# Altium PCB NIM_to_LVCMOS.PcbDoc
Units mil, origin at the board's own origin, x right, y up, seen from the top; angles counter-clockwise.
Board outline 2808.66 x 2046.77 mil, 4 copper layers (Top Layer, Layer 1, Layer 2, Bottom Layer), stack 23.756 mil thick; 48 components, 24 nets, 155 pads, 47 vias.
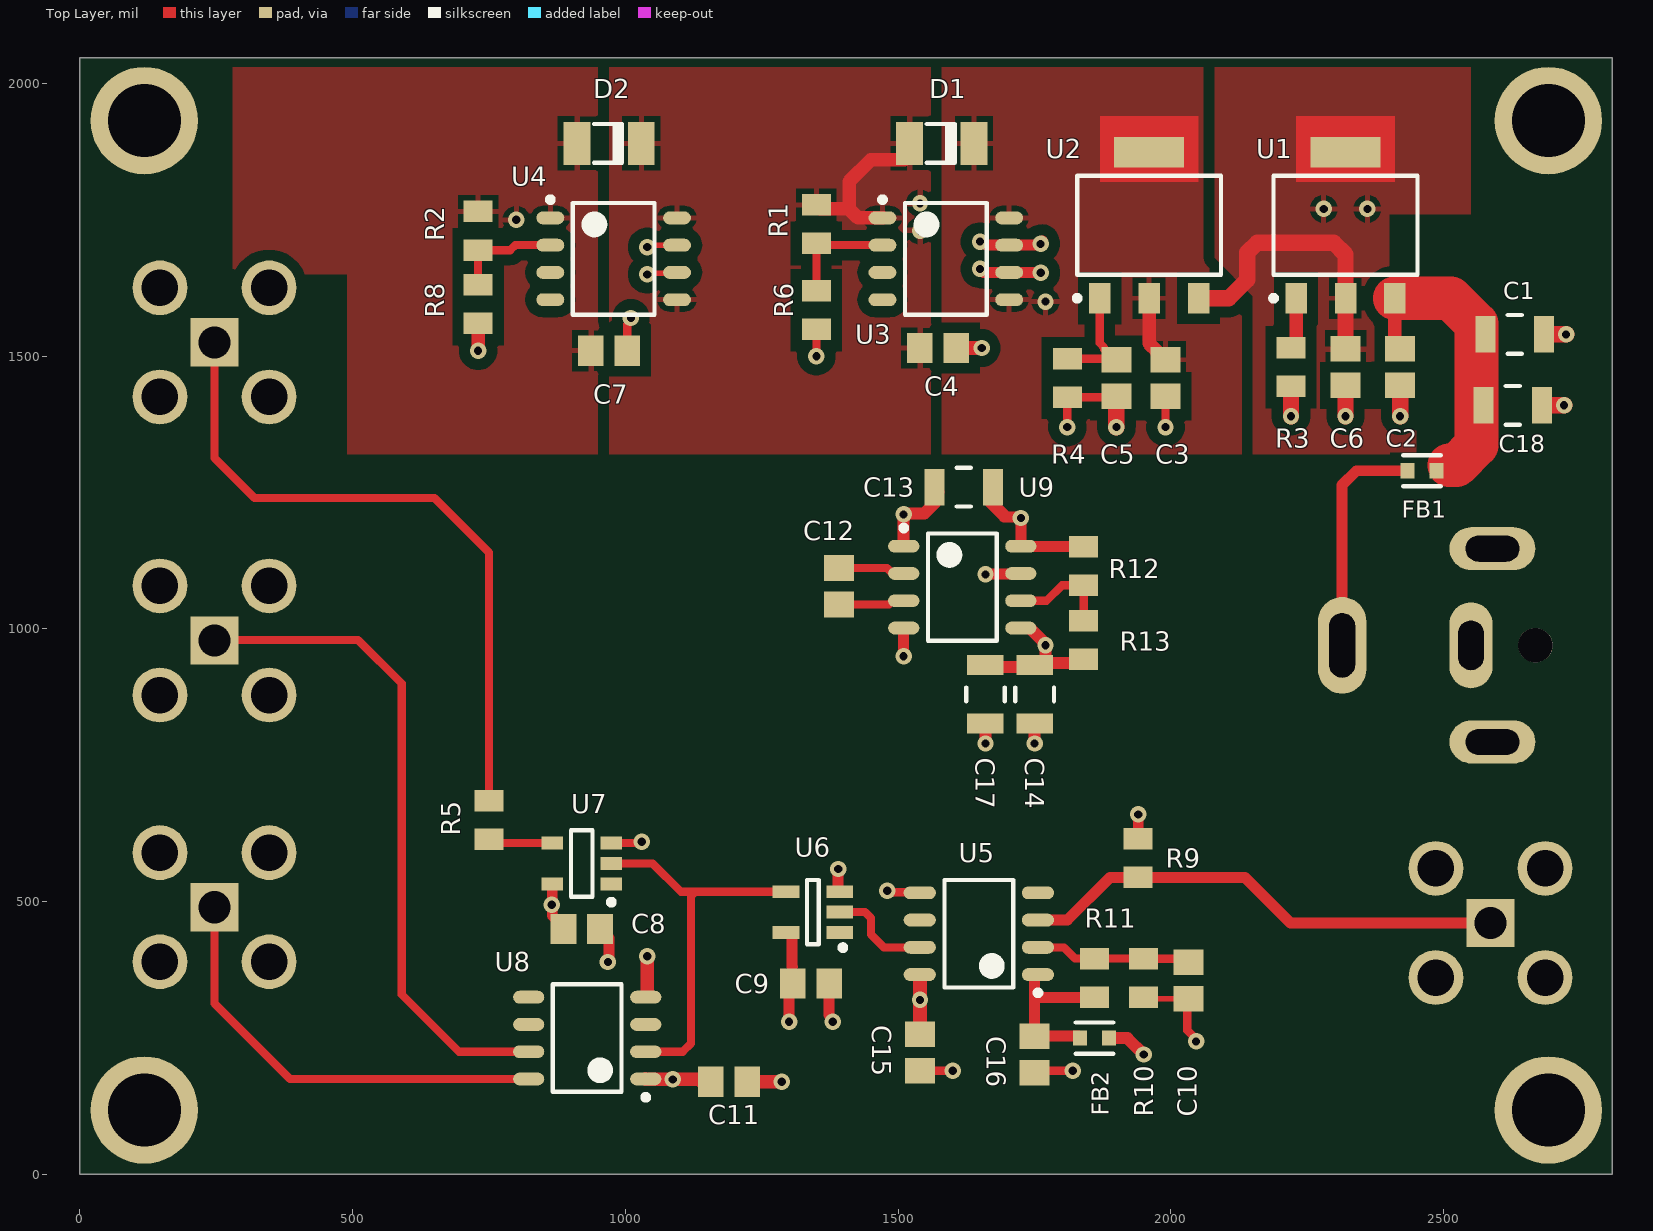
[diagram p0: Top Layer view]
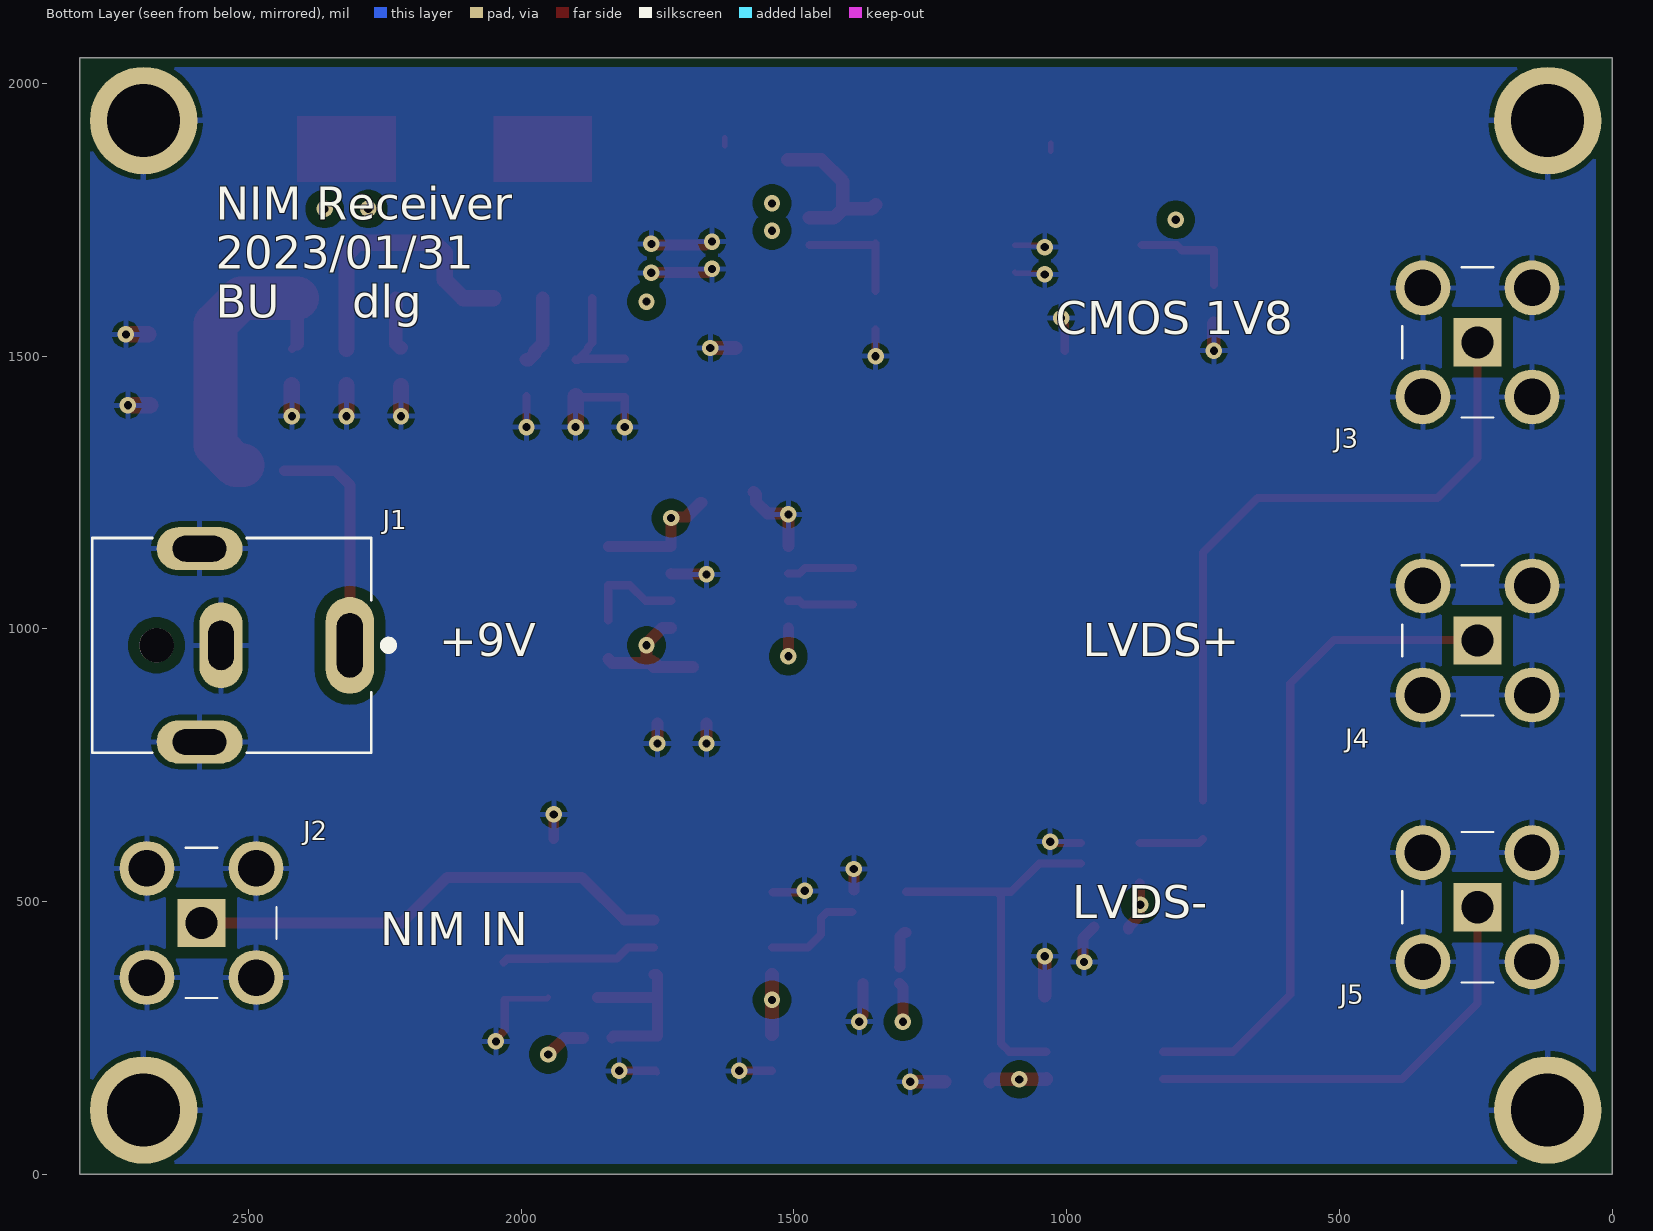
[diagram p1: Bottom Layer view, seen from below]
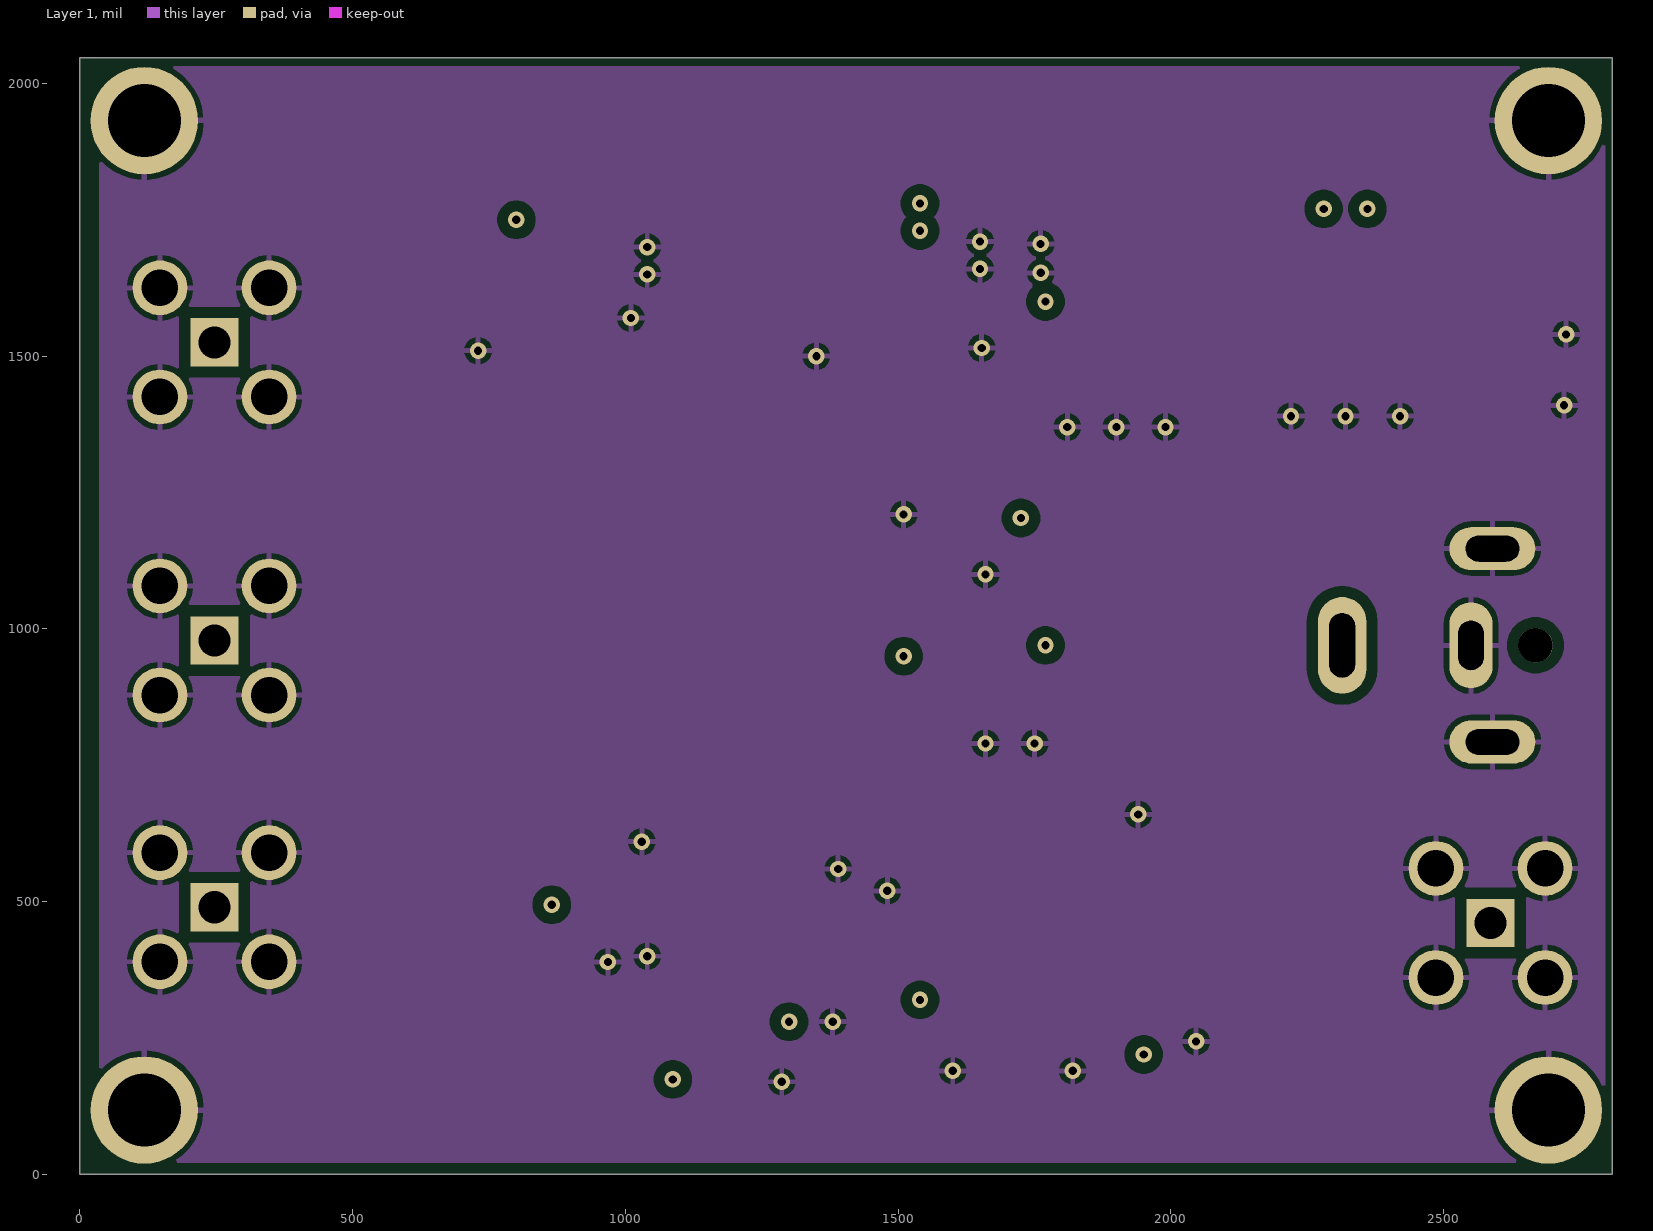
[diagram p2: Layer 1]
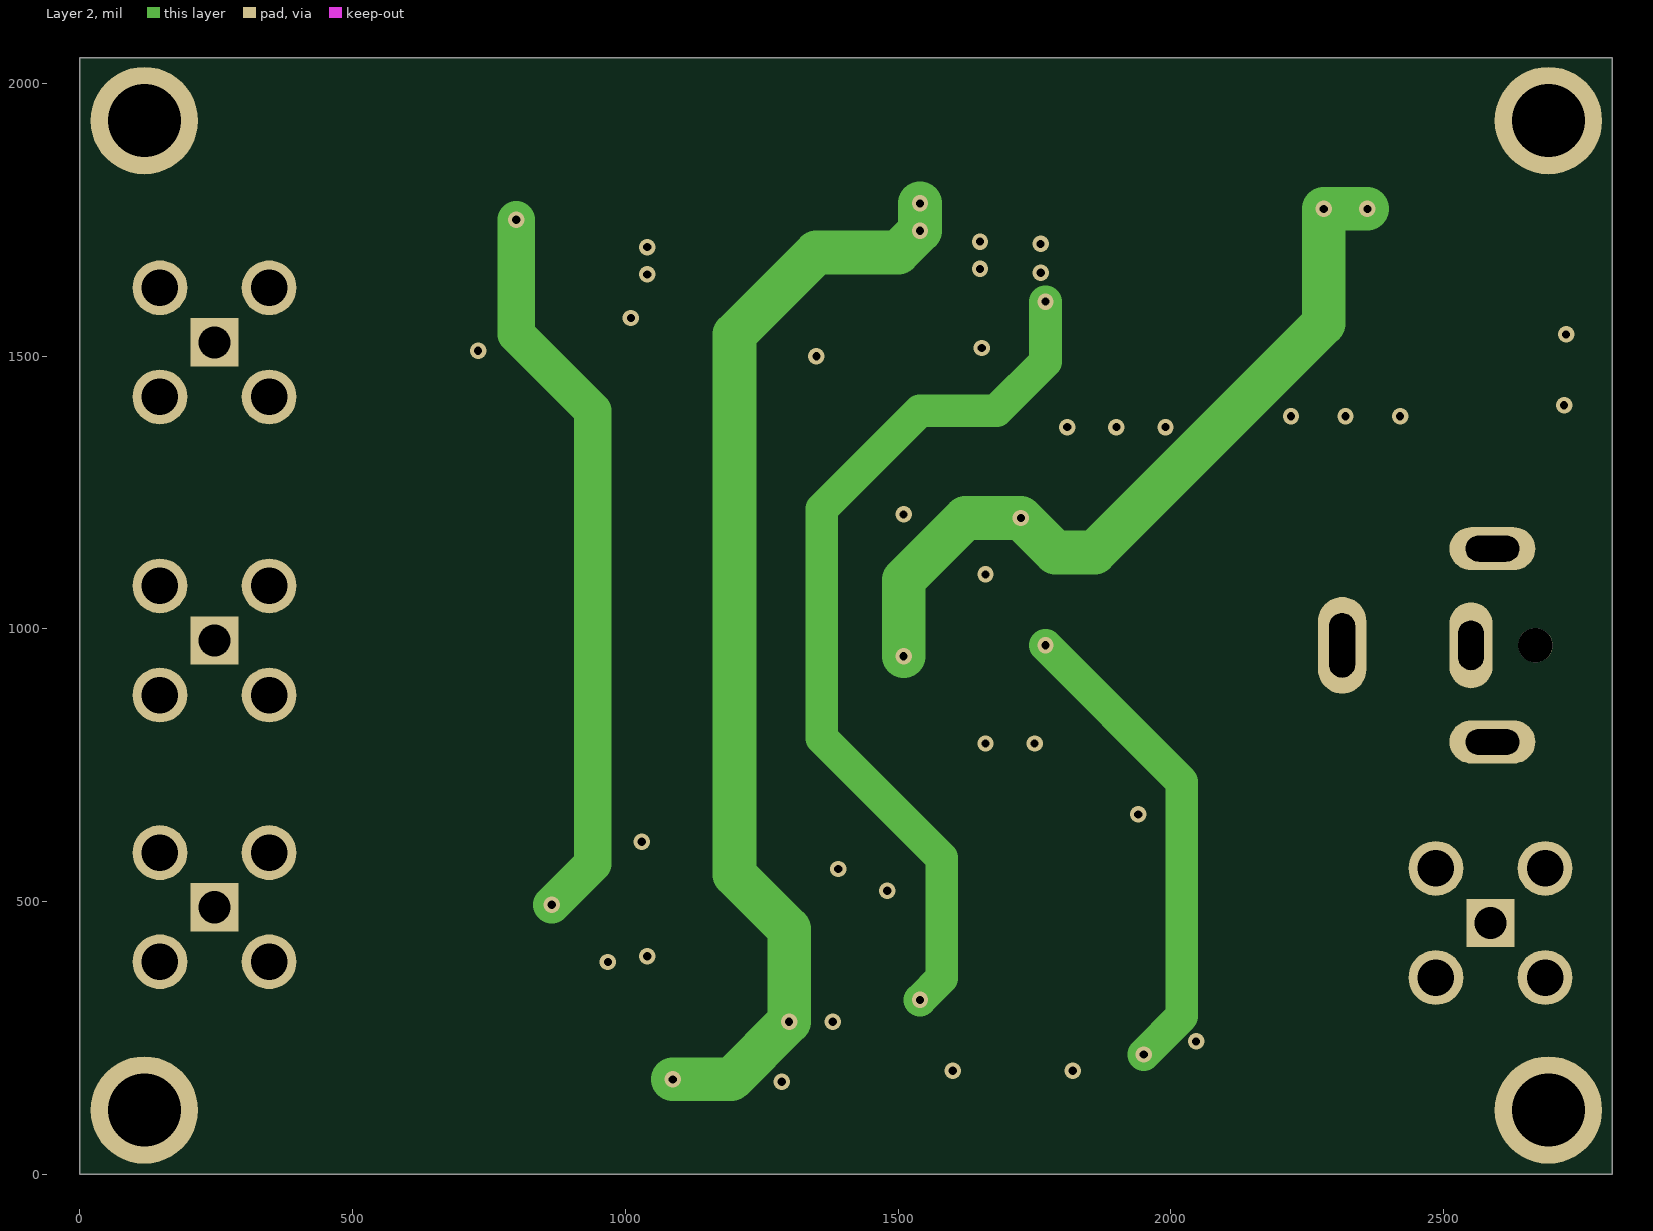
[diagram p3: Layer 2]
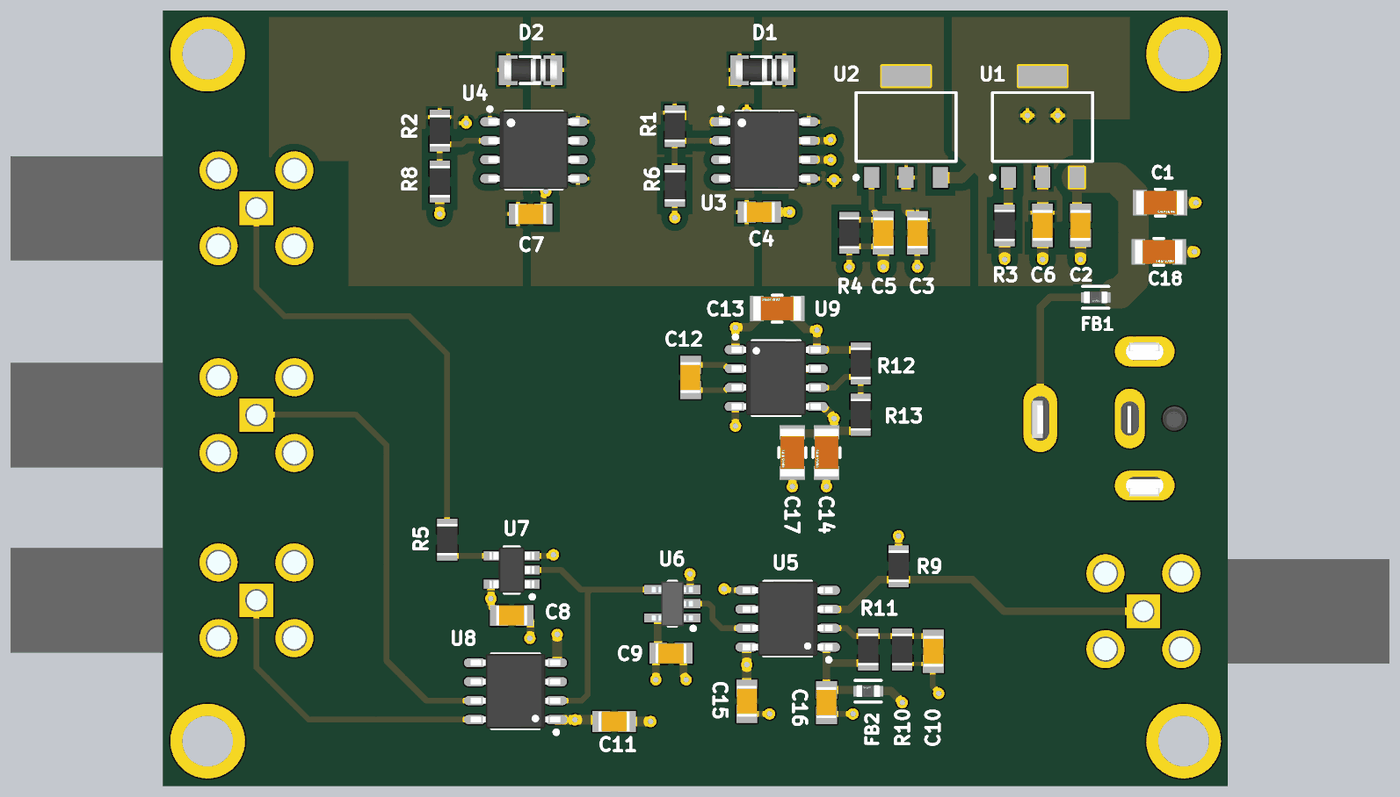
[diagram p4: 3D render of the assembled board from above, using the file's embedded part models]
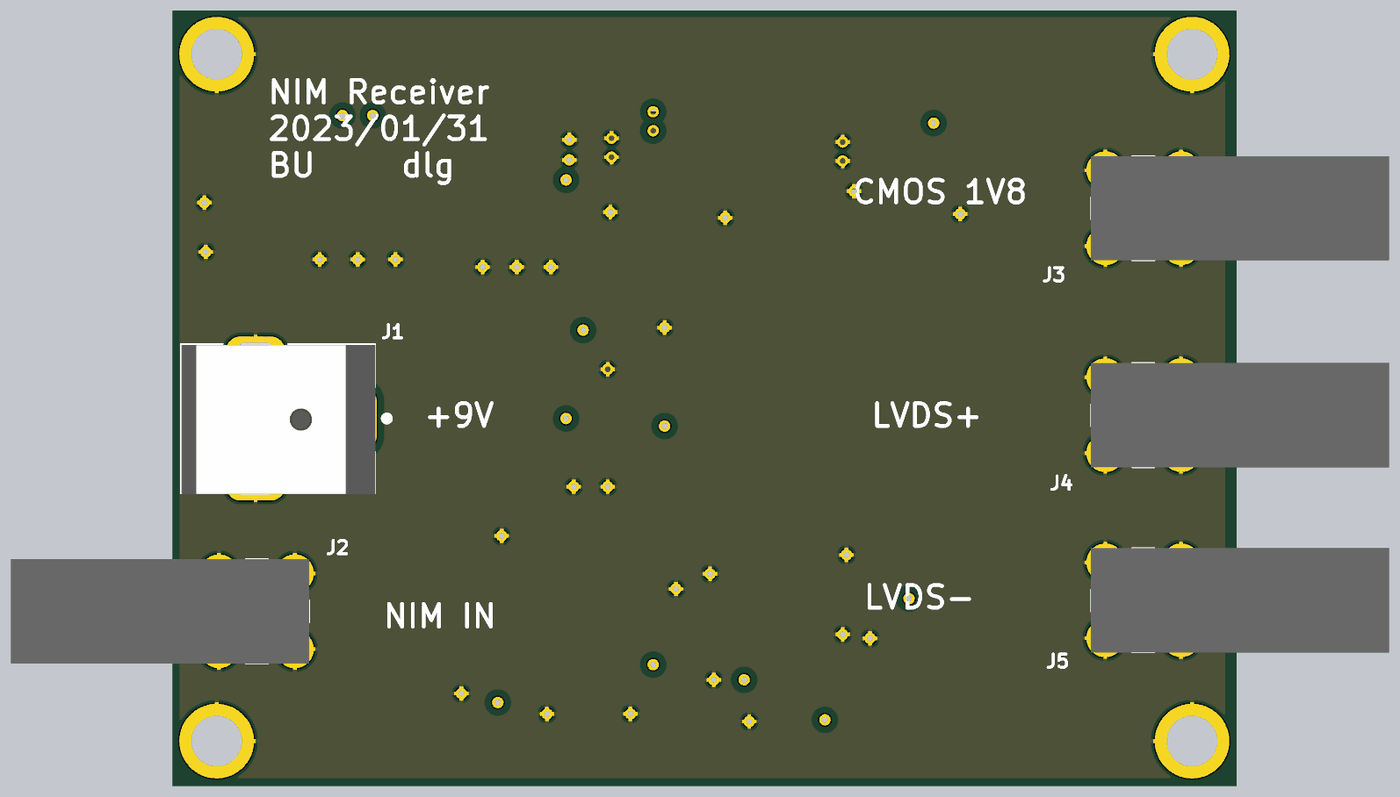
[diagram p5: 3D render of the assembled board from below, using the file's embedded part models]

## Layer stack, top to bottom
Top Solder: solder mask 0.4, Solder Resist, Dk 3.5
Top Layer: signal copper 1.4
Dielectric 2: prepreg 2.8, PP-006, Dk 4.1
Layer 1: signal copper 1.378
Dielectric 1: dielectric 12.6, FR-4, Dk 4.8
Layer 2: signal copper 1.378
Dielectric 3: prepreg 2.8, PP-006, Dk 4.1
Bottom Layer: signal copper 1.4
Bottom Solder: solder mask 0.4, Solder Resist, Dk 3.5

## Board outline
0,0 2808.66,0 2808.66,2046.77 0,2046.77

## Design rules (kind name [scope] priority, off if disabled: settings)
Clearance [All] p1: gap=6 ignorepadtopadclearanceinfootprint=TRUE except(20: Arc-Poly Track-Poly SMDPad-Poly THPad-Poly Via-Poly Fill-Poly Poly-Poly)
MinimumSolderMaskSliver [All] p1: minsoldermaskwidth=5
PolygonConnect [All] p1: connectstyle=Relief reliefconductorwidth=10 reliefentries=4 polygonreliefangle="90 Angle" airgapwidth=10
RoutingVias [All] p1: holewidth=15 width=30 viastyle="Through Hole" minholewidth=15 minwidth=30 maxholewidth=15 maxwidth=30
SolderMaskExpansion [All] p1: expansion=4 istentingtop=FALSE
Width [All] p1: maxlimit=80 minlimit=10 preferedwidth=10 minimp=50.000000 maximp=50.000000 favimp=50.000000
29 further rules are at their usual default settings.

## Components (designator, comment, footprint, x,y, rotation, side; value= is the part's Value field where it differs from the comment)
C1 "22uF" FP-CL31H-0_2-MFG 2630,1540 r0 top
C2 "2.2uF" CL21B225KAFNFNE 2420,1480 r270 top
C3 "2.2uF" CL21B225KAFNFNE 1990,1460 r270 top
C4 "2.2uF" CL21B225KAFNFNE 1573.07,1515 r0 top
C5 "0.1uF" CL21B104KACNNNC 1900,1460 r270 top
C6 "2.2uF" CL21B225KAFNFNE 2320,1480 r270 top
C7 "2.2uF" CL21B225KAFNFNE 970,1510 r180 top
C8 "0.1uF" CL21B104KACNNNC 920,450 r180 top
C9 "0.1uF" CL21B104KACNNNC 1340,350 r0 top
C10 "2.2uF" CL21B225KAFNFNE 2031.97,355.43 r270 top
C11 "0.1uF" CL21B104KACNNNC 1190,170 r0 top
C12 "2.2uF" CL21B225KAFNFNE 1391.34,1078.27 r270 top
C13 "22uF" FP-CL31H-0_2-MFG 1620,1260 r180 top
C14 "22uF" FP-CL31H-0_2-MFG 1750,880 r270 top
C15 "0.1uF" CL21B104KACNNNC 1540,223.46 r90 top
C16 "0.1uF" CL21B104KACNNNC 1750,220 r90 top
C17 "22uF" FP-CL31H-0_2-MFG 1660,880 r270 top
C18 "22uF" FP-CL31H-0_2-MFG 2626.36,1410 r0 top
D1 "Diode" BA679S-GS08 1580,1890 r180 top
D2 "Diode" BA679S-GS08 970,1890 r180 top
FB1 "BLM18PG471SN1D" FP-BLM18-0_15-t0_8-MFG 2460,1290 r0 top
FB2 "BLM18PG471SN1D" FP-BLM18-0_15-t0_8-MFG 1860,250 r180 top
J1 "Barrel Jack" PJ-063AH 2313.78,970 r0 bottom
J2 "SMA" RF249BT0050GHDW 2585.77,461.02 r180 bottom
J3 "SMA" RF249BT0050GHDW 246.79,1525.25 r0 bottom
J4 "SMA" RF249BT0050GHDW 246.79,978.88 r0 bottom
J5 "SMA" RF249BT0050GHDW 246.79,489.96 r0 bottom
R1 "102k" R0805 1350,1742.05 r90 top
R2 "12k" R0805 730,1730 r90 top
R3 "549k" R0805 2220,1480 r90 top
R4 "499k" R0805 1810,1460 r90 top
R5 "33" R0805 750,650 r90 top
R6 "30k" R0805 1350,1584.57 r90 top
R8 "30k" R0805 730,1595.43 r90 top
R9 "49R9" R0805 1940,580 r90 top
R10 "33" R0805 1950,360 r90 top
R11 "402R" R0805 1860,360 r270 top
R12 "111k" R0805 1840,1115.43 r270 top
R13 "105k" R0805 1840,980 r90 top
U1 "LT3080EST" LT-ST-3-SOT-223_N 2320,1740 r90 top locked
U2 "LT3080EST" LT-ST-3-SOT-223_N 1960,1740 r90 top locked
U3 "BD00KA5WF" BD00KA5WF-E2 1587.32,1678.5 r0 top
U4 "BD00KA5WF" BD00KA5WF-E2 978.5,1678.5 r0 top
U5 "SY100ELT25ZG-TR" SY100ELT25ZG-TR 1647.87,441.34 r180 top
U6 "MC74VHC1GT14DTT1" MC74VHC1GT14DTT1 1343.54,480.87 r180 top
U7 "SN74LV1T34DBVR" SN74LV1T34-DBV 920,570 r180 top
U8 "SN65LVDS1D" SN65LVDS1D 930,250 r180 top
U9 "MAX1673" MAX1673ESA+T 1617.48,1076.65 r0 top

## Footprints (in the part's own frame and the unit in brackets; to place one, negate y for a bottom-side part, rotate by r counter-clockwise, add the part's x,y. Pads: shape width x height; smd on the part's side, far side on the other; paste and mask are expansions set on the pad)
BA679S-GS08 [mm] "MELF Diode, 2-Leads, Body 3.50x1.50mm, IPC Medium Density"
  rect 1.25x2 smd: 1(-1.5,0) 2(1.5,0)
  silkscreen extent -0.7,-0.9 0.7,0.9, body extent -1.75,-0.74 1.75,0.74, height 1.5
BD00KA5WF-E2 [mm] "TSOP, 8-Leads, Body 5.00x4.40mm, Pitch 1.27mm, IPC Medium Density"
  oval 1.3x0.6 smd: 1(-2.95,1.905) 2(-2.95,0.635) 3(-2.95,-0.635) 4(-2.95,-1.905) 5(2.95,-1.905) 6(2.95,-0.635) 7(2.95,0.635) 8(2.95,1.905)
  silkscreen extent -3.07,-2.6 1.9,2.88, body extent -3.06,-2.6 3.06,2.6, height 1.6
CL21B104KACNNNC [mm] "0.1uF Chip Capacitor, 2-Leads, Body 2.00x1.25mm, IPC Medium Density"
  rect 1.2x1.4 smd: 1(-0.85,0) 2(0.85,0)
  body extent -1.05,-0.67 1.05,0.67, height 0.95
CL21B225KAFNFNE [mm] "2.2uF Chip Capacitor, 2-Leads, Body 2.00x1.25mm, IPC Medium Density"
  rect 1.2x1.4 smd: 1(-0.85,0) 2(0.85,0)
  body extent -1.05,-0.67 1.05,0.67, height 1.35
FP-BLM18-0_15-t0_8-MFG [mm]
  rect 0.65x0.7 smd paste+0 mask+0: 1(-0.675,0) 2(0.675,0)
  silkscreen extent -0.87,-0.72 0.87,0.72, body extent -1.1,-0.58 1.1,0.58, height 0.25
FP-CL31H-0_2-MFG [mm]
  rect 0.925x1.7 smd paste+0 mask+0: 1(-1.362,0) 2(1.362,0)
  silkscreen extent -0.33,-0.9 0.33,0.9, body extent -1.92,-1 1.92,1, height 0.25
LT-ST-3-SOT-223_N [mm] "SOT223, 4-Leads, Body 6.505x3.505mm, Pitch 2.3mm, IPC Medium Density"
  rect 1.4x1 smd: 1(-3.4,2.3) 2(-3.4,0) 3(-3.4,-2.3)
  rect 1.4x3.25 smd: 4(3.4,0)
  silkscreen extent -3.52,-3.35 2.3,3.47, body extent -1.86,-3.35 1.86,3.35, height 1.8
MAX1673ESA+T [mm] "SOIC, 8-Leads, Body 4.90x3.90mm, Pitch 1.27mm, IPC Medium Density"
  oval 1.45x0.6 smd: 1(-2.725,1.905) 2(-2.725,0.635) 3(-2.725,-0.635) 4(-2.725,-1.905) 5(2.725,-1.905) 6(2.725,-0.635) 7(2.725,0.635) 8(2.725,1.905)
  silkscreen extent -2.85,-2.5 1.6,2.88, body extent -3,-2.5 3,2.5, height 1.75
MC74VHC1GT14DTT1 [mm]
  rect 1.25x0.6 smd: 1(-1.25,0.95) 2(-1.25,0) 3(-1.25,-0.95) 4(1.25,-0.95) 5(1.25,0.95)
  silkscreen extent -1.52,-1.5 0.28,1.78, body extent -1.38,-1.5 1.38,1.5, height 1.1
PJ-063AH [mm]
  oval 2.25x4.5 hole 1.2 slot 3 at 90 deg: 1(0,0)
  oval 2x4 hole 1.2 slot 2.3 at 90 deg: 2(6,0)
  oval 4x2 hole 1.2 slot 2.5 at 0 deg: S1(7,4.5) S2(7,-4.5)
  round 1.6 hole 1.6 unplated: ""(9,0)
  silkscreen extent -2,-5 12,5, body extent -1.04,-5.08 11.96,5.22, height 9.01
R0805 [mm] "102k Chip Resistor, 2-Leads, Body 2.00x1.25mm, IPC Medium Density"
  rect 1x1.35 smd: 1(-0.9,0) 2(0.9,0)
  body extent -1.05,-0.67 1.05,0.67, height 0.6
RF249BT0050GHDW [mm]
  rect 2.25x2.25 hole 1.5: 1(0,0)
  round 2.55 hole 1.7: 2(-2.54,-2.54) 3(-2.54,2.54) 4(2.54,2.54) 5(2.54,-2.54)
  silkscreen extent -0.75,-3.5 3.5,3.5, body extent -16.47,-3.5 3.5,3.5, height 10.55
SN65LVDS1D [mm] "SOIC, 8-Leads, Body 4.90x3.90mm, Pitch 1.27mm, IPC Medium Density"
  oval 1.45x0.6 smd: 1(-2.725,1.905) 2(-2.725,0.635) 3(-2.725,-0.635) 4(-2.725,-1.905) 5(2.725,-1.905) 6(2.725,-0.635) 7(2.725,0.635) 8(2.725,1.905)
  silkscreen extent -2.85,-2.5 1.6,2.88, body extent -3,-2.5 3,2.5, height 1.75
SN74LV1T34-DBV [mm] "SOT23, 5-Leads, Body 2.90x2.80mm, Pitch 0.95mm, IPC Medium Density"
  rect 1x0.6 smd: 1(-1.375,0.95) 2(-1.375,0) 3(-1.375,-0.95) 4(1.375,-0.95) 5(1.375,0.95)
  silkscreen extent -1.5,-1.55 0.5,1.92, body extent -1.5,-1.53 1.5,1.53, height 1.45
SY100ELT25ZG-TR [mm] "SOIC, 8-Leads, Body 4.89x3.90mm, Pitch 1.27mm, IPC Medium Density"
  oval 1.5x0.6 smd: 1(-2.75,1.905) 2(-2.75,0.635) 3(-2.75,-0.635) 4(-2.75,-1.905) 5(2.75,-1.905) 6(2.75,-0.635) 7(2.75,0.635) 8(2.75,1.905)
  silkscreen extent -2.88,-2.5 1.6,2.88, body extent -3.01,-2.5 3.01,2.5, height 1.73

## Part data
C1 C13 C14 C17 C18: library part CMP-13271-000012-1, "CAP CER 22UF 25V X5R 1206", Manufacturer=Samsung, Manufacturer Part Number=CL31A226KAHNNNE, Package=CL31H-0.2, Temperature="-55°C to +85°C", Temperature Characteristic=X5R, Temperature Coefficient=15%, Temperature Range High=+85°C, Temperature Range Low=-55°C, Tolerance=10%, Voltage Rating=25V, Automotive=No, Capacitance=22uF, Category=Cap, ComponentLink2Description=Datasheet, ComponentLink2URL=http://www.samsungsem.com/kr/support/product-search/mlcc/__icsFiles/afieldfile/2019/05/10/19-CL31A226KAHNNNE.pdf, Device Class L1="Passive Components", Device Class L2=Capacitors, Device Class L3="Ceramic Capacitors", Digikey Description="CAP CER 22UF 25V X5R 1206", Height=1.8mm, Ipc Land Pattern Name=CAPC320160X160, Lead Free=Yes, Material=Ceramic, Octopart=https://octopart.com/cl31a226kahnnne-samsung-19832795, RoHS=TRUE
C2 C3 C4 C6 C7 C10 C12: library part CL21B225KAFNFNE, "CAP CER 2.2UF 25V X7R 0805", Case Code (Imperial)=0805, Case Code (Metric)=2012, Dielectric=X7R, Manufacturer=Samsung, Max Operating Temperature=125°C, Min Operating Temperature=-55°C, Package Quantity=1, Tolerance=10%, Voltage Rating=25V, Capacitance=2.2uF, Case/Package=0805, Category="Ceramic Capacitors", ComponentLink1Description=https://datasheet.ciiva.com/25798/cl21b225kafnfne-25798721.pdf?src-supplier=Digi-Key, ComponentLink1URL=https://datasheet.ciiva.com/25798/cl21b225kafnfne-25798721.pdf?src-supplier=Digi-Key, Construction=Flat, Depth=1.25mm, Height=1.25mm, Lead Free="Lead Free", Length=0.079inch, Manufacturer Part Number=CL21B225KAFNFNE, Mount="Surface Mount", Packaging="Tape and Reel", Pricing 1="2000=0.02328, 4000=0.02275, 8000=0.02221, 12000=0.02168, 16000=0.02114 (USD)", Radiation Hardening=No, RoHS=Yes, RoHS Compliant=Yes, Series=CL, Stock 1=46000, Supplier 1=Avnet, Supplier Part Number 1=CL21B225KAFNFNE, Thickness=0.053inch, Width=0.049inch
C5 C8 C9 C11 C15 C16: library part CL21B104KACNNNC, "CAP CER 0.1UF 25V X7R 0805", Capacitance=100nF, Case Code (Imperial)=0805, Case Code (Metric)=2012, Dielectric=X7R, Manufacturer=Samsung, Max Operating Temperature=125°C, Min Operating Temperature=-55°C, Package Quantity=1, Supplier Part Number 1=82AC9426, Tolerance=10%, Voltage=25V, Case/Package=0805, Category="Ceramic Capacitors", ComponentLink1Description=https://datasheet.ciiva.com/25801/cl21b104kacnnnc-25801824.pdf?src-supplier=Digi-Key, ComponentLink1URL=https://datasheet.ciiva.com/25801/cl21b104kacnnnc-25801824.pdf?src-supplier=Digi-Key, ComponentLink2Description=https://datasheet.ciiva.com/15216/getdatasheetpartid-355204-15216236.pdf?src-supplier=Verical, ComponentLink2URL=https://datasheet.ciiva.com/15216/getdatasheetpartid-355204-15216236.pdf?src-supplier=Verical, Construction=Flat, Contact Plating=Tin, Depth=1.25mm, Height=0.85mm, Length=2mm, Manufacturer Part Number=CL21B104KACNNNC, Mount="Surface Mount", Packaging="Tape and Reel", Pricing 1="1=0.00700, 4000=0.00700 (USD)", Radiation Hardening=No, RoHS=Yes, RoHS Compliant=Yes, Series=CL, Stock 1=16000, Supplier 1=Newark, Thickness=0.037inch, Voltage Rating=25V, Width=0.049inch
D1 D2: library part BA679S-GS08, "Diode PIN Attenuator 30V 2-Pin Mini-MELF SOD-80 T/R", Current Rating=50A, Forward Current=50mA, Forward Voltage=1V, Manufacturer="Vishay Semiconductors", Max Operating Temperature=125°C, Max Repetitive Reverse Voltage (Vrrm)=30V, Min Operating Temperature=-55°C, Package Quantity=2500, Supplier Part Number 1=112-BA679S-GS08CT-ND, Category=Diodes, ComponentLink1Description=https://datasheet.ciiva.com/1240/1749354-1240855.pdf?src-supplier=Newark, ComponentLink1URL=https://datasheet.ciiva.com/1240/1749354-1240855.pdf?src-supplier=Newark, ComponentLink2Description=https://datasheet.ciiva.com/9424/ba679-9424319.pdf?src-supplier=Avnet, ComponentLink2URL=https://datasheet.ciiva.com/9424/ba679-9424319.pdf?src-supplier=Avnet, ComponentLink3Description=https://datasheet.ciiva.com/1179/ba679-1179241.pdf?src-supplier=Element14, ComponentLink3URL=https://datasheet.ciiva.com/1179/ba679-1179241.pdf?src-supplier=Element14, Contact Plating=Tin,Silver, Diode Type="PIN - Single", Element Configuration=Single, Manufacturer Part Number=BA679S-GS08, Max Current Rating=50mA, Mount="Surface Mount", Number of Pins=2, Packaging="Tape and Reel", Pricing 1="1=0.53000, 10=0.43000, 100=0.29270, 500=0.21954, 1000=0.16466 (USD)", Reverse Voltage=30V, Reverse Voltage (DC)=30V, RoHS=Yes, RoHS Compliant=Yes, Series=-, Stock 1=7528, Supplier 1=Digi-Key
FB1 FB2: library part CMP-0686-00587-3, "Chip Ferrite Bead, 0603, 470Ω @ 100MHz, 0.2Ω, 25%, 1A", Case Code (Imperial)=0603, Case Code (Metric)=1608, Current Rating=1A, DC Resistance (DCR)=200mR, Max Operating Temperature=125°C, Min Operating Temperature=-55°C, Package Quantity=1, Test Frequency=100MHz, Tolerance=25%, Case/Package=0603, Core Material=Ferrite, DC Current=1A, DC Resistance-Max=200mR, Depth=0.8mm, Height=0.8mm, Impedance=470R, Lead Free="Lead Free", Length=1.6mm, Material=Steel, Max Current Rating=1A, Max DC Current=1A, Military Standard=Not, Number of Circuits=1, Number of Lines=1, Number of Pins=2, Packaging="Tape and Reel", Radiation Hardening=No, REACH SVHC="No SVHC", Resistance=200mR, RoHS Compliant=Yes, Series=BLM18P, Termination=SMD/SMT, Width=0.8mm
J1: library part PJ-063AH, "2.0 x 6.5 mm, 8.0 A, Horizontal, Through Hole, Shielded, Kinked Pins, Dc Power Jack Connector", Current Rating=8A, Flammability Rating="UL94 V-0", Housing Color=Black, Insulation Resistance=100MR, Manufacturer=CUI, Max Operating Temperature=85°C, Min Operating Temperature=-25°C, Package Quantity=500, Supplier Part Number 1=490-PJ-063AH, Voltage Rating=24V, Category=Connectors, ComponentLink1Description=https://www.cui.com/product/resource/digikeypdf/pj-063ah.pdf?src-supplier=Digi-Key, ComponentLink1URL=https://www.cui.com/product/resource/digikeypdf/pj-063ah.pdf?src-supplier=Digi-Key, ComponentLink2Description=https://www.cui.com/product/resource/digikeypdf/pj-063ah.pdf?src-supplier=Arrow+Electronics, ComponentLink2URL=https://www.cui.com/product/resource/digikeypdf/pj-063ah.pdf?src-supplier=Arrow+Electronics, ComponentLink3Description=https://www.cui.com/product/resource/digikeypdf/pj-063ah.pdf?src-supplier=Mouser, ComponentLink3URL=https://www.cui.com/product/resource/digikeypdf/pj-063ah.pdf?src-supplier=Mouser, ComponentLink4Description=https://www.cui.com/product/resource/digikeypdf/pj-063ah.pdf?src-supplier=Onlinecomponents.com, ComponentLink4URL=https://www.cui.com/product/resource/digikeypdf/pj-063ah.pdf?src-supplier=Onlinecomponents.com, ComponentLink5Description=http://www.cui.com/Product/Resource/FuturePDF/PJ-063AH.pdf?src-supplier=Future+Electronics, ComponentLink5URL=http://www.cui.com/Product/Resource/FuturePDF/PJ-063AH.pdf?src-supplier=Future+Electronics, ComponentLink6Description=https://www.cui.com/product/resource/digikeypdf/pj-063ah.pdf?src-supplier=Verical, ComponentLink6URL=https://www.cui.com/product/resource/digikeypdf/pj-063ah.pdf?src-supplier=Verical, ComponentLink7Description=https://www.cui.com/product/resource/digikeypdf/pj-063ah.pdf?src-supplier=Quest, ComponentLink7URL=https://www.cui.com/product/resource/digikeypdf/pj-063ah.pdf?src-supplier=Quest, ComponentLink8Description=https://www.cui.com/product/resource/digikeypdf/pj-063ah.pdf?src-supplier=NAC+Semi, ComponentLink8URL=https://www.cui.com/product/resource/digikeypdf/pj-063ah.pdf?src-supplier=NAC+Semi, Connector Type=Jack, Contact Gender=Male, Contact Material=Copper, Contact Plating=Nickel, Gender=Male, Housing Material=Thermoplastic, Lead Free="Lead Free", Manufacturer Part Number=PJ-063AH, Mount="Through Hole", Number of Conductors=2, Orientation=Horizontal, RoHS=Yes, RoHS Compliant=Yes, Series=-, Shielding=Shielded, Supplier 1=Mouser, Termination="Through Hole"
J2 J3 J4 J5: library part RF2-49B-T-00-50-G-HDW, "Conn SMA 0Hz to 6GHz 50Ohm Solder RA Thru-Hole RCP Gold", Manufacturer="Adam Equipment", Category="RF / Coaxial Connectors", Manufacturer Part Number=RF2-49B-T-00-50-G-HDW, Pricing 1="1=3.05500, 10=2.75100, 25=2.58300, 50=2.49800, 100=2.35600, 300=2.04400, 500=1.97200 (USD)", RoHS=No, Stock 1=26, Supplier 1="Arrow Electronics", Supplier Part Number 1=RF2-49B-T-00-50-G-HDW
R1: library part RC0805FR-07102KL, "Res Thick Film 0805 102K Ohm 1% 1/8W ±100ppm/°C SMD Paper T/R", Case Code (Imperial)=0805, Case Code (Metric)=2012, Manufacturer=Yageo, Max Operating Temperature=155°C, Max Power Dissipation=125mW, Min Operating Temperature=-55°C, Package Quantity=1, Resistance=102kR, Resistor Type="Thick Film", Supplier Part Number 1=32AK1123, Temperature Coefficient=100ppm/°C, Tolerance=1%, Voltage Rating=150V, Case/Package=0805, Category="Chip SMD Resistors", ComponentLink1Description=https://datasheet.ciiva.com/2457/pyu-r-int-thick-7-2457663.pdf?src-supplier=Digi-Key, ComponentLink1URL=https://datasheet.ciiva.com/2457/pyu-r-int-thick-7-2457663.pdf?src-supplier=Digi-Key, ComponentLink2Description=https://datasheet.ciiva.com/2457/pyu-r-int-thick-7-2457664.pdf?src-supplier=Digi-Key, ComponentLink2URL=https://datasheet.ciiva.com/2457/pyu-r-int-thick-7-2457664.pdf?src-supplier=Digi-Key, ComponentLink3Description=https://datasheet.ciiva.com/2457/pyu-r-int-thick-7-2457662.pdf?src-supplier=Digi-Key, ComponentLink3URL=https://datasheet.ciiva.com/2457/pyu-r-int-thick-7-2457662.pdf?src-supplier=Digi-Key, Construction=Rectangular, Contact Plating=Tin,Matte,Lead, Depth=1.25mm, Features="Moisture Resistant", Height=0.024inch, Lead Free="Lead Free", Length=2mm, Manufacturer Part Number=RC0805FR-07102KL, Military Standard=Not, Number of Terminations=2, Packaging="Tape and Reel", Power Rating=125mW, Pricing 1="10=0.10000, 25=0.02900, 50=0.02100, 100=0.01200 (USD)", Radiation Hardening=No, RoHS=Yes, RoHS Compliant=Yes, Series=RC, Stock 1=24480, Supplier 1=Newark, Termination=SMD/SMT, Voltage Rating (DC)=150V, Width=0.049inch
R2: library part RC0805JR-0712KL, "Res Thick Film 0805 12K Ohm 5% 0.125W(1/8W) ±100ppm/C Pad SMD T/R", Case Code (Imperial)=0805, Case Code (Metric)=2012, Manufacturer=Yageo, Max Operating Temperature=155°C, Max Power Dissipation=125mW, Min Operating Temperature=-55°C, Package Quantity=5000, Resistance=12kR, Resistance Tolerance=5%, Resistor Type="Thick Film", Supplier Part Number 1=26M6818, Temperature Coefficient=100ppm/°C, Voltage Rating=150V, Case/Package=0805, Category="Chip SMD Resistors", ComponentLink1Description=https://datasheet.ciiva.com/7941/442941-7941880.pdf?src-supplier=Element14, ComponentLink1URL=https://datasheet.ciiva.com/7941/442941-7941880.pdf?src-supplier=Element14, ComponentLink2Description=https://datasheet.ciiva.com/7941/442941-7941881.pdf?src-supplier=Element14, ComponentLink2URL=https://datasheet.ciiva.com/7941/442941-7941881.pdf?src-supplier=Element14, ComponentLink3Description=https://datasheet.ciiva.com/17082/rc0805-17082649.pdf?src-supplier=Future+Electronics, ComponentLink3URL=https://datasheet.ciiva.com/17082/rc0805-17082649.pdf?src-supplier=Future+Electronics, Construction=Rectangular, Contact Plating=Tin,Lead, Depth=1.25mm, Features="Moisture Resistant", Height=0.5mm, Lead Free="Lead Free", Length=2mm, Manufacturer Part Number=RC0805JR-0712KL, Military Standard=Not, Number of Terminations=2, Packaging="Cut Tape", Power Rating=125mW, Pricing 1="10=0.10000, 25=0.02900, 50=0.02100, 100=0.01300, 250=0.01200, 500=0.01100 (USD)", Radiation Hardening=No, RoHS=Yes, RoHS Compliant=Yes, Series=RC, Size Code=0805, Stock 1=2308, Supplier 1=Newark, Termination=SMD/SMT, Tolerance=5%, Width=1.25mm
R3: library part "R0805 549k", "549 kOhms ±1% 0.125W, 1/8W Chip Resistor 0805 (2012 Metric) Automotive AEC-Q200, High Voltage Thick Film", Part=KTR10EZPF5493
R4: library part "R0805 499k", "499k kOhms ±1% 0.125W, 1/8W Chip Resistor 0805 (2012 Metric)", Part=RC0805FR-07499KL
R5 R10: library part RC0805FR-0733RL, "Res Thick Film 0805 33 Ohm 1% 1/8W +/-100ppm/ßC Molded SMD Paper T/R", Case Code (Imperial)=0805, Case Code (Metric)=2012, Manufacturer=Yageo, Max Operating Temperature=155°C, Max Power Dissipation=125mW, Min Operating Temperature=-55°C, Package Quantity=1, Resistance=33R, Resistance Tolerance=1%, Resistor Type="Thick Film", Temperature Coefficient=100ppm/°C, Voltage Rating=150V, Case/Package=0805, Category="Chip SMD Resistors", ComponentLink1Description=https://datasheet.ciiva.com/11808/0900766b8106beab-11808886.pdf?src-supplier=RSComponents, ComponentLink1URL=https://datasheet.ciiva.com/11808/0900766b8106beab-11808886.pdf?src-supplier=RSComponents, ComponentLink2Description=https://datasheet.ciiva.com/46447/444164-46447578.pdf?src-supplier=Element14, ComponentLink2URL=https://datasheet.ciiva.com/46447/444164-46447578.pdf?src-supplier=Element14, ComponentLink3Description=https://datasheet.ciiva.com/2457/pyu-r-int-thick-7-2457741.pdf?src-supplier=Digi-Key, ComponentLink3URL=https://datasheet.ciiva.com/2457/pyu-r-int-thick-7-2457741.pdf?src-supplier=Digi-Key, ComponentLink4Description=https://datasheet.ciiva.com/2457/pyu-r-int-thick-7-2457742.pdf?src-supplier=Digi-Key, ComponentLink4URL=https://datasheet.ciiva.com/2457/pyu-r-int-thick-7-2457742.pdf?src-supplier=Digi-Key, ComponentLink5Description=https://datasheet.ciiva.com/2457/pyu-r-int-thick-7-2457740.pdf?src-supplier=Digi-Key, ComponentLink5URL=https://datasheet.ciiva.com/2457/pyu-r-int-thick-7-2457740.pdf?src-supplier=Digi-Key, ComponentLink6Description=https://datasheet.ciiva.com/5561/rc0805-257173-5561849.pdf?src-supplier=Mouser, ComponentLink6URL=https://datasheet.ciiva.com/5561/rc0805-257173-5561849.pdf?src-supplier=Mouser, ComponentLink7Description=https://datasheet.ciiva.com/7941/444164-7941773.pdf?src-supplier=Element14, ComponentLink7URL=https://datasheet.ciiva.com/7941/444164-7941773.pdf?src-supplier=Element14, ComponentLink8Description=https://datasheet.ciiva.com/7941/444164-7941772.pdf?src-supplier=Element14, ComponentLink8URL=https://datasheet.ciiva.com/7941/444164-7941772.pdf?src-supplier=Element14, ComponentLink9Description=https://datasheet.ciiva.com/17486/rc0805-17486554.pdf?src-supplier=Future+Electronics, ComponentLink9URL=https://datasheet.ciiva.com/17486/rc0805-17486554.pdf?src-supplier=Future+Electronics, Construction=Rectangular, Depth=1.25mm, Features="Moisture Resistant", Height=0.5mm, Lead Free="Lead Free", Length=2mm, Manufacturer Part Number=RC0805FR-0733RL, Military Standard=Not, Number of Terminations=2, Packaging="Tape and Reel", Power Rating=125mW, Pricing 1="5000=0.00227, 10000=0.00224, 20000=0.00217 (USD)", RoHS=Yes, RoHS Compliant=Yes, Series=RC, Size Code=0805, Stock 1=25000, Supplier 1=Avnet, Supplier Part Number 1=RC0805FR-0733RL, Technology="THICK FILM", Termination=SMD/SMT, Tolerance=1%, Width=0.049inch
R6 R8: library part RC0805JR-0730KL, "Res Thick Film 0805 30K Ohm 5% 0.125W(1/8W) ±100ppm/C Pad SMD T/R", Case Code (Imperial)=0805, Case Code (Metric)=2012, Manufacturer=Yageo, Max Operating Temperature=155°C, Max Power Dissipation=125mW, Min Operating Temperature=-55°C, Resistance=30kR, Resistor Type="Thick Film", Supplier Part Number 1=82AH8404, Temperature Coefficient=100ppm/°C, Tolerance=5%, Voltage Rating=150V, Case/Package=0805, Category="Chip SMD Resistors", ComponentLink1Description=https://datasheet.ciiva.com/16747/rc0805-16747179.pdf?src-supplier=Future+Electronics, ComponentLink1URL=https://datasheet.ciiva.com/16747/rc0805-16747179.pdf?src-supplier=Future+Electronics, Construction=Rectangular, Contact Plating=Tin,Lead,Matte, Depth=1.25mm, Features="Moisture Resistant", Lead Free="Lead Free", Length=2mm, Manufacturer Part Number=RC0805JR-0730KL, Military Standard=Not, Number of Terminations=2, Packaging="Tape and Reel", Power Rating=125mW, Pricing 1="10=0.01500, 25=0.01200, 50=0.00900, 100=0.00600 (USD)", Radiation Hardening=No, RoHS=Yes, RoHS Compliant=Yes, Series=RC, Size Code=0805, Stock 1=4349, Supplier 1=Newark, Termination=SMD/SMT, Voltage Rating (DC)=150V
R9: library part "R0805 49R9", "49.9 kOhms ±1% 0.125W, 1/8W Chip Resistor 0805 (2012 Metric) Moisture Resistant Thick Film", Part=RC0805FR-0749K9L
R11: library part "R0805 402R", Part=RC0805FR-07402RL
R12: library part "R0805 111k", "111 kOhms ±1% 0.125W, 1/8W Chip Resistor 0805 (2012 Metric)", Part=RNCP0805FTD11K0
R13: library part "R0805 105k", "105 kOhms ±1% 0.125W, 1/8W Chip Resistor 0805 (2012 Metric)", Part=RMCF0805FT105K
U1 U2: library part CMP-0472-00054-1, "Adjustable 1.1 A Single Resistor Low Dropout Regulator, 0.3 mA Isupply, 3-pin SOT223 (ST-3), -40 to 125 degC", Extended Temp="E, I", Manufacturer="Linear Technology", ComponentLink1Description="Manufacturer URL", ComponentLink1URL=http://www.linear.com/, ComponentLink2Description=Datasheet, ComponentLink2URL=http://cds.linear.com/docs/en/datasheet/3080fc.pdf, ComponentLink3Description="Package Specification", ComponentLink3URL=http://cds.linear.com/docs/en/packaging/SOT_3_05-08-1630.pdf, DatasheetVersion="Rev. F", Initial Accuracy(%)=1, Isupply(mA)=0.3, Mounting Technology="Surface Mount", PackageDescription="3-Pin Plastic SOT-223, Body 3.505 x 6.505 mm, Pitch 2.3 mm", PackageReference=ST-3, PackageVersion=Jun-10, PartNumber=LT3080EST, RoHS=FALSE, Vin Max(V)=36, Vin Min(V)=1.2
U3 U4: library part BD00KA5WF-E2, "LDO Regulator Pos 1V to 4V 0.5A Automotive 8-Pin SOP T/R", Case/Package=SOP, Dropout Voltage=120mV, Manufacturer=Rohm, Max Input Voltage=5.5V, Max Operating Temperature=105°C, Max Output Current=500mA, Max Output Voltage=4V, Max Power Dissipation=687.6mW, Min Input Voltage=2.3V, Min Operating Temperature=-40°C, Min Output Voltage=1V, Package Quantity=1, Reference Voltage=758mV, Supplier Part Number 1=BD00KA5WF-E2CT-ND, Category="Voltage Regulators - Linear", ComponentLink1Description=https://datasheet.ciiva.com/26878/getdatasheetpartid-457808-26878767.pdf?src-supplier=Verical, ComponentLink1URL=https://datasheet.ciiva.com/26878/getdatasheetpartid-457808-26878767.pdf?src-supplier=Verical, ComponentLink2Description=https://datasheet.ciiva.com/22732/1747249-22732896.pdf?src-supplier=Element14, ComponentLink2URL=https://datasheet.ciiva.com/22732/1747249-22732896.pdf?src-supplier=Element14, ComponentLink3Description=https://datasheet.ciiva.com/2040/bdxxka5-e-2040541.pdf?src-supplier=Digi-Key, ComponentLink3URL=https://datasheet.ciiva.com/2040/bdxxka5-e-2040541.pdf?src-supplier=Digi-Key, ComponentLink4Description=https://datasheet.ciiva.com/2040/bdxxka5-e-2040542.pdf?src-supplier=Digi-Key, ComponentLink4URL=https://datasheet.ciiva.com/2040/bdxxka5-e-2040542.pdf?src-supplier=Digi-Key, ComponentLink5Description=https://datasheet.ciiva.com/2040/bdxxka5-e-2040543.pdf?src-supplier=Digi-Key, ComponentLink5URL=https://datasheet.ciiva.com/2040/bdxxka5-e-2040543.pdf?src-supplier=Digi-Key, Contact Plating=Copper,Tin, Lead Free="Lead Free", Manufacturer Part Number=BD00KA5WF-E2, Mount="Surface Mount", Number of Outputs=1, Number of Pins=8, Number of Regulators=1, Output Current=500mA, Output Type=Adjustable, Output Voltage=4V, Packaging="Tape and Reel", Polarity=Positive, Pricing 1="1=1.69000, 10=1.50700, 25=1.43040, 100=1.17510, 250=1.09848, 500=0.97074, 1000=0.76638 (USD)", Radiation Hardening=No, RoHS=Yes, RoHS Compliant=Yes, Series=-, Stock 1=9113, Supplier 1=Digi-Key
U5: "Dual Diff Ecl To Ttl Translator, 8 Soic 3.90Mm(.150In) T/R", Case/Package=SOIC, High Level Output Current=-3mA, Low Level Output Current=24mA, Manufacturer=Microchip, Max Operating Temperature=85°C, Max Supply Voltage=5.5V, Min Operating Temperature=-40°C, Min Supply Voltage=4.5V, Operating Supply Voltage=5V, Package Quantity=1000, Supplier Part Number 1=150-SY100ELT25ZG-TRCT-ND, Category="Clock Buffers, Drivers", Channel Type=Unidirectional, ComponentLink1Description=https://datasheet.ciiva.com/1901/sy100elt25-1901076.pdf?src-supplier=Digi-Key, ComponentLink1URL=https://datasheet.ciiva.com/1901/sy100elt25-1901076.pdf?src-supplier=Digi-Key, Lead Free="Lead Free", Logic Function=Translator, Manufacturer Part Number=SY100ELT25ZG-TR, Mount="Surface Mount", Number of Bits=1, Number of Channels=1, Number of Circuits=1, Number of Pins=8, Output Type=TTL, Packaging="Tape and Reel", Pricing 1="1=4.65000, 25=3.87960, 100=3.52980 (USD)", Propagation Delay=3.6ns, RoHS=Yes, RoHS Compliant=Yes, Series=100ELT, Stock 1=1000, Supplier 1=Digi-Key, Technology=ECL, Turn-On Delay Time=3.6ns
U6: "Inverter Schmitt Trigger Sgl Cmos 5TSOP", Case/Package=SOT-23-5, High Level Output Current=-8mA, Low Level Output Current=8mA, Manufacturer="ON Semiconductor", Max Operating Temperature=125°C, Max Supply Voltage=5.5V, Min Operating Temperature=-55°C, Min Supply Voltage=3V, Package Quantity=3000, Supplier Part Number 1=863-MC74VHC1GT14DTT1, Category="Logic Gates", ComponentLink1Description=https://datasheet.ciiva.com/4828/mc74vhc1gt14-d-107443-4828755.pdf?src-supplier=Mouser, ComponentLink1URL=https://datasheet.ciiva.com/4828/mc74vhc1gt14-d-107443-4828755.pdf?src-supplier=Mouser, ComponentLink2Description=https://datasheet.ciiva.com/7970/mc74vhc1gt14-d-7970445.pdf?src-supplier=Element14, ComponentLink2URL=https://datasheet.ciiva.com/7970/mc74vhc1gt14-d-7970445.pdf?src-supplier=Element14, Lead Free="Contains Lead", Logic Function="Schmitt Trigger,Inverter", Manufacturer Part Number=MC74VHC1GT14DTT1, Number of Circuits=1, Number of Gates=1, Number of Inputs=1, Number of Pins=5, Output Current=8mA, Packaging="Tape and Reel", Reach SVHC Compliant=Yes, RoHS=No, RoHS Compliant=No, Supplier 1=Mouser
U7: "IC BUFFER GATE SGL CMOS SOT23-5", Case/Package=SOT-23-5, High Level Output Current=-8mA, Low Level Output Current=8mA, Manufacturer="Texas Instruments", Max Operating Temperature=125°C, Max Supply Voltage=5.5V, Min Operating Temperature=-40°C, Min Supply Voltage=1.6V, Package Quantity=3000, Quiescent Current=1uA, Category="Buffers, Drivers and Transceivers", ComponentLink1Description=https://datasheet.ciiva.com/29634/sn74lv1t34-29634759.pdf?src-supplier=Digi-Key, ComponentLink1URL=https://datasheet.ciiva.com/29634/sn74lv1t34-29634759.pdf?src-supplier=Digi-Key, ComponentLink2Description=https://datasheet.ciiva.com/29634/sn74lv1t34-29634758.pdf?src-supplier=Digi-Key, ComponentLink2URL=https://datasheet.ciiva.com/29634/sn74lv1t34-29634758.pdf?src-supplier=Digi-Key, ComponentLink3Description=https://datasheet.ciiva.com/29634/sn74lv1t34-29634760.pdf?src-supplier=Digi-Key, ComponentLink3URL=https://datasheet.ciiva.com/29634/sn74lv1t34-29634760.pdf?src-supplier=Digi-Key, ComponentLink4Description=https://datasheet.ciiva.com/29888/sn74lv1t34-29888041.pdf?src-supplier=Avnet, ComponentLink4URL=https://datasheet.ciiva.com/29888/sn74lv1t34-29888041.pdf?src-supplier=Avnet, Lead Free="Lead Free", Logic Function=Buffer,Inverting, Manufacturer Part Number=SN74LV1T34DBVR, Mount="Surface Mount", Number of Bits=1, Number of Bits per Element=1, Number of Channels=1, Number of Elements=1, Number of Input Lines=1, Number of Inputs=1, Number of Output Lines=1, Number of Outputs=1, Number of Pins=5, Operating Supply Current=8mA, Output Type=PUSH-PULL,3-STATE, Packaging="Tape and Reel", Polarity=Non-Inverting, Pricing 1="1=0.51900, 10=0.42320, 100=0.26150, 500=0.21660, 1000=0.16270, 3000=0.14770 (USD)", Propagation Delay=15.5ns, Radiation Hardening=No, Reach SVHC Compliant=Yes, RoHS=Yes, RoHS Compliant=Yes, Series=74LV, Stock 1=1800, Supplier 1="Arrow Electronics", Supplier Part Number 1=SN74LV1T34DBVR, Technology=CMOS, Weight=0.000353oz
U8: "630-Mbps single LVDS driver 8-SOIC -40 to 85", Case/Package=SOIC, Manufacturer="Texas Instruments", Max Operating Temperature=85°C, Max Power Dissipation=725mW, Max Supply Voltage=3.6V, Min Operating Temperature=-40°C, Min Supply Voltage=2.4V, Nominal Supply Current=15mA, Operating Supply Voltage=3.3V, Package Quantity=75, Supplier Part Number 1=595-SN65LVDS1D, Category="Interface ICs", ComponentLink1Description=https://datasheet.ciiva.com/15151/getdatasheetpartid-163203-15151570.pdf?src-supplier=Verical, ComponentLink1URL=https://datasheet.ciiva.com/15151/getdatasheetpartid-163203-15151570.pdf?src-supplier=Verical, ComponentLink2Description=https://datasheet.ciiva.com/1771/sn65lvds1-1771428.pdf?src-supplier=Digi-Key, ComponentLink2URL=https://datasheet.ciiva.com/1771/sn65lvds1-1771428.pdf?src-supplier=Digi-Key, ComponentLink3Description=https://datasheet.ciiva.com/3151/sn65lvdt2-3151544.pdf?src-supplier=Avnet, ComponentLink3URL=https://datasheet.ciiva.com/3151/sn65lvdt2-3151544.pdf?src-supplier=Avnet, ComponentLink4Description=https://datasheet.ciiva.com/41461/001187532-da-01-en-ic-hs-diff-line-dr-sn65lvds1d-soic-8-tid-41461269.pdf?src-supplier=Conrad, ComponentLink4URL=https://datasheet.ciiva.com/41461/001187532-da-01-en-ic-hs-diff-line-dr-sn65lvds1d-soic-8-tid-41461269.pdf?src-supplier=Conrad, Data Rate=630Mbps, Height=1.58mm, Lead Free="Lead Free", Length=4.9mm, Manufacturer Part Number=SN65LVDS1D, Mount="Surface Mount", Number of Drivers=1, Number of Elements=1, Number of Pins=8, Number of Receivers=1, Packaging=Rail/Tube, Power Dissipation=725mW, Pricing 1="1=2.57000, 10=2.32000, 25=2.19000, 50=2.19000, 75=1.86000, 100=1.86000, 300=1.74000, 525=1.53000, 1000=1.53000, 1050=1.27000, 10000=1.27000 (USD)", Propagation Delay=3.1ns, Radiation Hardening=No, Reach SVHC Compliant=Yes, RoHS=Yes, RoHS Compliant=Yes, Series=65LVDS, Stock 1=778, Supplier 1=Mouser, Supply Current=15mA, Turn-On Delay Time=3.1ns, Weight=0.002561oz, Width=3.91mm
U9: library part MAX1673ESA+T, "5.5 V 125 mA 460kHz Charge Pump SMT Switching Regulator - SOIC-8", Case/Package=SOIC, Manufacturer=Maxim, Max Input Voltage=5.5V, Max Operating Temperature=85°C, Min Operating Temperature=-40°C, Output Current=125mA, Output Voltage=-3.15V, Package Quantity=2500, Switching Frequency=350kHz, Category="Voltage Regulators - Switching", ComponentLink1Description=https://datasheet.ciiva.com/24013/max1673-85133-24013456.pdf?src-supplier=Mouser, ComponentLink1URL=https://datasheet.ciiva.com/24013/max1673-85133-24013456.pdf?src-supplier=Mouser, ComponentLink2Description=https://datasheet.ciiva.com/3216/max1673-3216094.pdf?src-supplier=Avnet, ComponentLink2URL=https://datasheet.ciiva.com/3216/max1673-3216094.pdf?src-supplier=Avnet, ComponentLink3Description=https://datasheet.ciiva.com/2037/max1673-2037237.pdf?src-supplier=Digi-Key, ComponentLink3URL=https://datasheet.ciiva.com/2037/max1673-2037237.pdf?src-supplier=Digi-Key, Lead Free="Lead Free", Logic Function=Inverting, Manufacturer Part Number=MAX1673ESA+T, Mount="Surface Mount", Number of Outputs=1, Output Type=Adjustable, Packaging="Tape and Reel", Pricing 1="1=6.45840, 10=5.76150, 25=5.40040, 100=4.64370, 250=4.36660, 500=3.88360, 1000=3.47760 (USD)", Radiation Hardening=No, RoHS=Yes, RoHS Compliant=Yes, Series=-, Stock 1=1576, Supplier 1="Arrow Electronics", Supplier Part Number 1=MAX1673ESA+T, Synchronous Rectifier=No, Width=4mm

## Free pads (board coordinates)
  round 196.85 hole 133.86: 2(118.11,118.11) 2(118.11,1931.89) 2(2691.89,118.11) 2(2691.89,1931.89)

## Via types
v1: diameter 30/30/30/30 (per signal layer), hole 15, Top Layer to Bottom Layer, 41 vias
v2: diameter 30, hole 15, Top Layer to Bottom Layer, 6 vias

## Nets (pads, with @x,y where several pads share a name; then routed paths per layer and width w, separated by ;. In a path a pad name is that pad's centre, name@x,y a point inside that pad or via, vN(x,y) a via of type N, cw(c..) or ccw(c..) an arc to the next point about the centre after c; other vN are vias at no path point)
1.8V: C7.2 C8.2 D2.2 R2.2 U4.1 U7.5 | length 1435.9
  Top Layer w20: U7.5 865.87,474.61 886.54,453.94 C8.2
  Layer 2 w69: v1(800,1750) 800,1540 940,1400 940,569.44 v1(864.95,494.39)
3.3V: C4.1 C9.1 C11.1 D1.2 D2.1 R1.2 U3.1 U4.5 U4.8 U6.5 U8.1 | length 2588.7
  Top Layer w10: D2.1@1029.06,1875.24 D2.1
  Top Layer w20: U6.5 1298.19,443.46 1305,436.65 1305,381.54 1306.54,380 ; v1(1300,280) 1300,343.46 C9.1
  Top Layer w25: U8.1 1037.97,174.31 v1(1086.83,174.31) 1135.69,174.31 C11.1@1140,170 ; R1.2 1357.48,1770 1410,1770 ; U3.1 1426.5,1753.5 1410,1770 ; D1.2@1510.94,1860 1450,1860 1410,1820 1410,1770
  Layer 2 w80: v1(1086.83,174.31) 1194.31,174.31 v1(1300,280) 1300,450 1200,550 1200,1540 1350,1690 1500,1690 v1(1540,1730) v1(1540,1780)
5.5V: C6.1 C13.1 R12.1 U1.2 U1.4 U2.3 U9.4 U9.8 | length 2299.3
  Top Layer w20: v1(1510,950) 1510.1,950.1 1510.1,1001.56 U9.4 ; R12.1 1839.61,1151.26 U9.8@1725.35,1151.26 ; 1698.24,1205.22 1723.05,1205.22 v1(1724.96,1203.31) 1724.86,1203.21 U9.8@1724.86,1151.75 ; 1698.24,1205.22 1694.31,1205.22 1668.07,1231.46 1672.01,1231.46 1698.24,1205.22 ; U9.8@1724.86,1151.75 U9.8@1725.35,1151.26 ; U9.8@1724.86,1151.75 U9.8 1725.16,1151.26 U9.8@1725.35,1151.26
  Top Layer w30: U2.3 2106.14,1606.14 2140,1640 2140,1690 2158.03,1708.03 2298.46,1708.03 2320,1686.5 U1.2 C6.1
  Layer 2 w80: v1(1510,950) 1510,1090 1623.31,1203.31 v1(1724.96,1203.31) 1788.27,1140 1860,1140 2280,1560 v1(2280,1770) v1(2360,1770)
5V: C3.1 C15.2 D1.1 U2.2 U2.4 U3.5 U3.8 U5.8 | length 1931
  Top Layer w10: D1.1@1626.69,1885.67 D1.1@1626.69,1900.43
  Top Layer w25: U5.8 1540,365.94 v1(1540,320) C15.2 ; U2.2 1960,1523.46 1974.94,1508.52 1974.94,1504.59 1986.06,1493.46 C3.1 ; U2.4 1978.41,1873.86 U2.4@1993.46,1888.92
  Layer 2 w60: v1(1540,320) 1580,360 1580,580 1360,800 1360,1220 1540,1400 1680,1400 1770,1490 v1(1770,1600)
9V: C1.1 C2.1 C18.1 FB1.2 U1.3 | length 553.1
  Top Layer w15: C2.1@2410.55,1522.91 C2.1
  Top Layer w25: C2.1@2410.55,1522.91 U1.3
  Top Layer w80: U1.3 2513.14,1606.14 2560,1559.28 2560,1336.86 2523.14,1300 2510,1300
-5.2V: C16.2 FB2.2 R11.2 U5.1 | length 315.2
  Top Layer w20: U5.1 1751.67,366.34 1750,364.67 1750,320 ; FB2.2 1833.43,250.67 1830.63,253.46 C16.2 1750,320 ; R11.2 1754.57,324.57 1750,320
adj1v8: R2.1 R8.2 U4.2 | length 200.1
  Top Layer w15: R8.2 R2.1 730.43,1694.14 788.78,1694.14 798.15,1703.5 U4.2
adj3v3: R1.1 R6.2 U3.2 | length 209.1
  Top Layer w10: R1.1 R1.1@1353.11,1703.5
  Top Layer w15: R6.2 R1.1 ; R1.1@1353.11,1703.5 U3.2
CAP+: C12.1 U9.2 | length 123
  Top Layer w15: C12.1 1479.7,1111.73 1489.78,1101.65 U9.2
CAP-: C12.2 U9.3 | length 121.7
  Top Layer w15: C12.2 1482.93,1044.8 1489.78,1051.65 U9.3
cmos_3v3: U6.4 U7.2 U8.2 | length 712.2
  Top Layer w15: U7.2 1050,570 1101.73,518.27 1128.27,518.27 ; U8.2 1105,225 1120,240 1120,510 1128.27,518.27 ; U6.4 1128.27,518.27
D: C10.1 R10.2 R11.1 U5.2 | length 286.8
  Top Layer w15: U5.2 1803.66,416.34 1824.28,395.72 1860,395.72 R10.2@1949.72,395.72 ; R10.2 2025.43,395.43 C10.1
D\: J2.1 R9.1 U5.3 | length 896.6
  Top Layer w20: U5.3 1810,466.34 1888.23,544.57 R9.1 2135.43,544.57 2218.98,461.02 J2.1
FB: R12.2 R13.2 U9.6 | length 191.5
  Top Layer w15: U9.6 1771.65,1051.65 1800,1080 R12.2 R13.2
GND: C1.2 C2.2 C3.2 C4.2 C5.2 C6.2 C7.1 C8.1 C9.2 C10.2 C11.2 C13.2 C14.2 C15.1 C16.1 C17.2 C18.2 J1.2 J1.S1 J1.S2 J2.2 J2.3 J2.4 J2.5 J3.2 J3.3 J3.4 J3.5 J4.2 J4.3 J4.4 J4.5 J5.2 J5.3 J5.4 J5.5 pad.2 R3.1 R4.1 R6.1 R8.1 R9.2 R10.1 U3.6 U3.7 U4.6 U4.7 U5.5 U6.3 U7.3 U8.4 U9.1 U9.7 | length 2141.7
  Top Layer w10: v1@1003.46,1558.05 1010,1564.59 v1(1010,1570) ; v2@1027.4,607.4 v2(1030,610) ; U8.4 U8.4@1040,327.72 ; v1(1040,1650) 1041.75,1651.75 1092.89,1651.75 U4.6 ; v1(1040,1700) 1043.5,1703.5 U4.7 ; U6.3@1390,521.02 U6.3 ; v1@1477.3,517.3 v1(1480,520) ; U9.1@1510,1151.85 U9.1 ; U5.5@1538.64,517.3 U5.5 ; C16.1 C16.1@1753.46,190 ; R10.1 1952.6,321.97 C10.2 C10.2@2030,320
  Top Layer w15: U7.3 v2@1027.4,607.4 ; C7.1 v1@1003.46,1558.05 ; v1(1350,1500) R6.1 ; v1@1480,517.3 U5.5@1538.64,517.3 ; C15.1 v1(1600,190) ; C16.1@1753.46,190 v1(1820,190) ; v1(1810,1370) R4.1 1898.03,1424.57 C5.2 ; v1(1990,1370) C3.2 ; C10.2@2030,320 2030,264.06 2046.06,248 v1(2046.06,243.94)
  Top Layer w20: C8.1@950,453.46 C8.1 970,433.46 970,391.78 v1(967.78,389.55) ; C9.2 1373.46,291.95 1380,285.41 v1(1380,280) ; U6.3@1390,521.02 v2(1390,560) ; v1(1650,1660) 1656.5,1653.5 U3.6 1703.78,1653.19 1760.98,1653.19 v1(1761.3,1652.88) ; v1(1650,1710) 1655.41,1710 1661.91,1703.5 U3.7 1756.5,1703.5 v1@1764.43,1711.43 ; v1(1660,1100) 1660.96,1100.96 1724.07,1100.96 U9.7 ; R9.2 v1(1940,660)
  Top Layer w22: U9.1@1510,1151.85 1510.1,1151.95 1510.1,1209.9 v1(1510,1210) 1511.53,1211.53 1548.07,1211.53 1568.99,1232.46 1568.99,1246.71 C13.2@1573.57,1251.29 ; v2(1660,790) C17.2 ; v2(1750,790) C14.2
  Top Layer w25: v1(730,1510) R8.1 ; U8.4@1040,327.72 v1(1040,400) ; C11.2 v1(1286.54,170) ; C4.2 v1(1653.07,1515)
  Top Layer w30: v1(1900,1370) C5.2 ; v1(2220,1390) R3.1 ; v1(2320,1390) C6.2 ; v1(2420,1390) C2.2 ; C18.2 v2(2720.75,1410) ; C1.2 v2(2724.39,1540)
  other v1: 1761.09,1705.89
lvds_n: J5.1 U8.8 | length 809.9
  Top Layer w15: J5.1 246.79,313.21 385,175 U8.8
lvds_p: J4.1 U8.7 | length 1223
  Top Layer w15: J4.1 247.91,980 510,980 590,900 590,330 695,225 U8.7
NetC14_1: C14.1 C17.1 FB2.1 R13.1 U9.5 | length 1208.2
  Top Layer w22: C17.1@1684.65,929.97 1684.91,930.23 1750,930.23 C14.1@1757.04,930.23 ; U9.5 1741.06,1001.65 1768.47,974.24 1768.47,971.53 v1(1770,970) 1770,940.85 C14.1@1760,940.85 ; C14.1 C14.1@1753.64,937.28 ; C14.1@1769.83,937.53 1832.96,937.53 R13.1 ; FB2.1 1920,250 v1(1950,220)
  Layer 2 w60: v1(1770,970) 2020,720 2020,290 v1(1950,220)
NetFB1_1: FB1.1 J1.1 | length 424.3
  Top Layer w20: J1.1 2313.78,1263.78 2340,1290 FB1.1
NetJ3_1: J3.1 R5.2 | length 1241.6
  Top Layer w15: J3.1 246.79,1313.21 320,1240 650,1240 750,1140 R5.2
NetR5_1: R5.1 U7.4 | length 118.8
  Top Layer w15: R5.1 757.17,607.4 U7.4
SET1: R3.2 U1.1 | length 95.9
  Top Layer w25: R3.2 2222.26,1515.43 2229.45,1522.62 U1.1
SET2: C5.1 R4.2 U2.1 | length 211.7
  Top Layer w15: R4.2 C5.1@1894.09,1495.43 ; U2.1 1869.45,1524.02 1877.44,1516.02 1877.44,1512.09 C5.1@1894.09,1495.43 ; C5.1 1896.06,1493.46 C5.1@1894.09,1495.43
TTL: U5.7 U6.2 | length 191.2
  Top Layer w15: U6.2 1439.13,480.87 1450,470 1450,440 1473.66,416.34 U5.7
pads on no net: J1. U3.3 U3.4 U4.3 U4.4 U5.4 U5.6 U6.1 U7.1 U8.3 U8.5 U8.6

## Polygon pours and split planes (outlines as drawn)
5.5V on Top Layer "tga" (solid, pour order 1): 2550,1760 2400,1760 2400,1630 2450,1630 2450,1320 2150,1320 2150,1610 2080,1680 2080,2030 2550,2030
3.3V on Top Layer "3.3V_L01_P003" (solid, pour order 3): 1570,1320 1570,2030 970,2030 970,1320
5V on Top Layer "5V_L01_P002" (solid, pour order 2): 2140,1320 1580,1320 1580,2030 2070,2030 2070,1640 2080,1630 2120,1630 2140,1610
1.8V on Top Layer "1.8V_L01_P004" (solid, pour order 4): 960,2030 960,1320 490,1320 490,1650 280,1650 280,2030
GND on Layer 1 "GND_L02_P005" (solid, pour order 5): 35.84,2031.58 35.84,21.58 2795.84,21.58 2795.84,2031.58
GND on Bottom Layer "GND_L04_P000" (solid, pour order 0): 30,2030 30,20 2790,20 2790,2030

## Other copper
Top Layer:
  region net 5.5V: 2230,1940 2230,1820 2410,1820 2410,1940
  region net 5V: 1870,1940 1870,1820 2050,1820 2050,1940

## Silkscreen, mask and mechanical layers (free items; w line width, h text height)
Bottom Overlay:
  text "NIM Receiver / 2023/01/31 / BU     dlg" at 2560,1570 h60
  text "CMOS 1V8" at 1020,1540 h60
  text "LVDS+" at 970,950 h60
  text "+9V" at 2150,950 h60
  text "LVDS-" at 990,470 h60
  text "NIM IN" at 2257.9,420.01 h60
Outline:
  lines w10: 0,0 2810,0 2810,2050 0,2050 0,0